# Altium PCB mag_pos_connect.PcbDoc
Units mm, origin at the board's own origin, x right, y up, seen from the top; angles counter-clockwise.
Board outline 14 x 13.92 mm, 2 copper layers (Top Layer, Bottom Layer), stack 1.671 mm thick; 5 components, 4 nets, 8 pads, 1 vias.
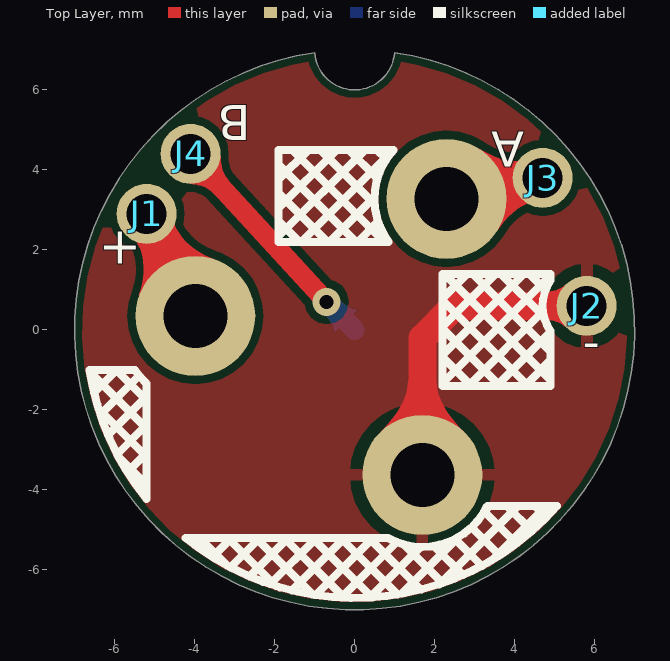
[diagram p0: Top Layer view]
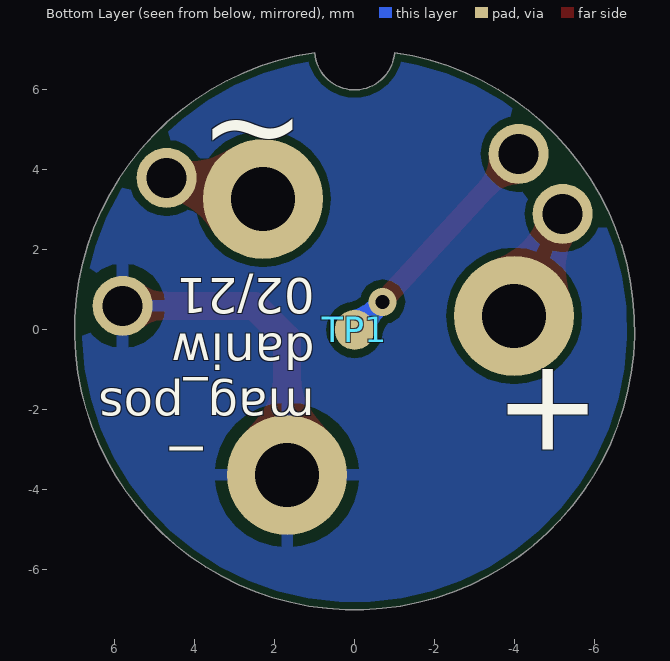
[diagram p1: Bottom Layer view, seen from below]

## Layer stack, top to bottom
Top Solder: solder mask 0.0102, Solder Resist, Dk 3.5
Top Layer: signal copper 0.0356
Dielectric 1: dielectric 1.6, FR-4, Dk 4.8
Bottom Layer: signal copper 0.0356
Bottom Solder: solder mask 0.0102, Solder Resist, Dk 3.5

## Board outline
-0.997,6.929 ccw(c0,0) 0.997,6.929 cw(c0,7)

## Design rules (kind name [scope] priority, off if disabled: settings)
Clearance [All] p1: gap=0.2 ignorepadtopadclearanceinfootprint=FALSE except(0: Arc-Hole Track-Hole SMDPad-Hole THPad-Hole Via-Hole Fill-Hole Poly-Hole Region-Hole Text-Hole)
ComponentClearance [All] p1: gap=0.2 collisioncheckmode=3 verticalgap=0.2 showdistances=FALSE
HoleSize [All] p1: absolutevalues=TRUE maxlimit=3.2 minlimit=0.3 maxpercent=80.000 minpercent=20.000
HoleToHoleClearance [All] p1: gap=0.3 allowstackedmicrovias=TRUE
MinimumAnnularRing [All] p1: minimumring=0.15
MinimumSolderMaskSliver [All] p1: minsoldermaskwidth=0.1
PolygonConnect [All] p1: thpad.connectstyle=Relief thpad.reliefconductorwidth=0.3 thpad.reliefentries=4 thpad.polygonreliefangle="90 Angle" thpad.airgapwidth=0.3 smdpad.connectstyle=Relief smdpad.reliefconductorwidth=0.25 smdpad.reliefentries=4 smdpad.polygonreliefangle="90 Angle" smdpad.airgapwidth=0.25 via.connectstyle=Direct via.reliefconductorwidth=0.254 via.reliefentries=4 via.polygonreliefangle="90 Angle" via.airgapwidth=0.254
RoutingVias [All] p1: holewidth=0.35 width=0.7 viastyle="Through Hole" minholewidth=0.3 minwidth=0.65 maxholewidth=0.5 maxwidth=3
SilkToSilkClearance [All] p1: silktosilkclearance=0.1
SilkToSolderMaskClearance [IsPad] p1: minsilkscreentomaskgap=0.15 clearancetoexposedcopper=TRUE
SolderMaskExpansion SolderMaskExpansion_Via [IsVia] p1: expansion=0.102 istentingtop=TRUE
SolderMaskExpansion [All] p2: expansion=0.05 istentingtop=FALSE
Width [All] p1: maxlimit=1 minlimit=0.2 preferedwidth=0.2 minimp=50.000000 maximp=50.000000 favimp=50.000000
24 further rules are at their usual default settings.

## Components (designator, comment, footprint, x,y, rotation, side; value= is the part's Value field where it differs from the comment)
J1 "+5V" WIRE_1MM_1.5MM_THT -5.2,2.9 r0 top
J2 "GND" WIRE_1MM_1.5MM_THT 5.8,0.6 r0 top
J3 "A" WIRE_1MM_1.5MM_THT 4.7,3.8 r0 top
J4 "B" WIRE_1MM_1.5MM_THT -4.1,4.4 r0 top
TP1 "B" TP_SMD_1MM 0,0 r180 bottom

## Footprints (in the part's own frame and the unit in brackets; to place one, negate y for a bottom-side part, rotate by r counter-clockwise, add the part's x,y. Pads: shape width x height; smd on the part's side, far side on the other; paste and mask are expansions set on the pad)
TP_SMD_1MM [mm] "Testpoint SMD 1mm"
  round 1 smd: 1(0,0)
  body extent -0.5,-0.5 0.5,0.5, height 0.1
WIRE_1MM_1.5MM_THT [mm] "Wire with 1mm diameter, 1.5mm pad diameter"
  round 1.5 hole 1: 1(0,0)
  body extent -0.35,-0.35 0.35,0.35, height 3

## Part data
J1 J2 J3 J4: library part Wire_1MM, "1mm Wire", System=Connector
TP1: library part TP_SMD_1mm, "Testpoint SMD 1mm"

## Free pads (board coordinates)
  round 3 hole 1.6: 1(-3.985,0.349) 1(1.69,-3.625) 1(2.294,3.277)

## Via types
v1: diameter 0.7, hole 0.35, Top Layer to Bottom Layer, tented both sides, 1 vias

## Nets (pads, with @x,y where several pads share a name; then routed paths per layer and width w, separated by ;. In a path a pad name is that pad's centre, name@x,y a point inside that pad or via, vN(x,y) a via of type N, cw(c..) or ccw(c..) an arc to the next point about the centre after c; other vN are vias at no path point)
+5V: J1.1 pad.1@-3.985,0.349 | length 2.8
  Top Layer w1: J1.1 pad.1@-3.985,0.349
A: J3.1 pad.1@2.294,3.277 | length 2.5
  Top Layer w1: pad.1@2.294,3.277 J3.1
B: J4.1 TP1.1 | length 6
  Top Layer w0.5: J4.1 v1(-0.7,0.7)
  Bottom Layer w0.5: v1(-0.7,0.7) TP1.1
GND: J2.1 pad.1@1.69,-3.625 | length 7.9
  Top Layer w0.7: pad.1@1.69,-3.625 1.69,-0.21 2.5,0.6 J2.1

## Polygon pours and split planes (outlines as drawn)
no net on Top Overlay "NONET_L03_P-001" (hatched 45Degree grid 0.5 track 0.2, remove dead copper): 2.2,-1.4 2.2,1.4 4.9,1.4 4.9,1.232 ccw(c5.8,0.6) 4.9,-0.032 4.9,-1.4
no net on Top Overlay "NONET_L03_P-001" (hatched 45Degree grid 0.5 track 0.2, remove dead copper): -1.9,2.2 0.852,2.2 cw(c2.294,3.277) 0.974,4.5 -1.9,4.5
no net on Top Overlay "NONET_L-01_P-001" (hatched 45Degree grid 0.5 track 0.2, remove dead copper): -5.2,-4.225 cw(c0,0) -6.625,-1 -5.497,-1 ccw(c-4,0) -5.2,-1.342
no net on Top Overlay "NONET_L03_P-001" (hatched 45Degree grid 0.5 track 0.2, remove dead copper): -4.225,-5.2 ccw(c0,0) 5.053,-4.4 3.315,-4.4 cw(c1.69,-3.625) 0.819,-5.2
GND on Bottom Layer "GND_L04_P002" (solid, remove dead copper, pour order 2): -1.162,6.7 ccw(c0,0) 1.162,6.7 cw(c0,7)
GND on Top Layer "GND_L01_P003" (solid, remove dead copper, pour order 3): -1.162,6.7 ccw(c0,0) 1.162,6.7 cw(c0,7)

## Silkscreen, mask and mechanical layers (free items; w line width, h text height)
Top Overlay:
  text "B" at -2.6,5.9 h1.5 r180
  text "A" at 4.245,5.237 h1.5 r180
  text "+" at -6.4,1.334 h1.6
  text "-" at 5.7,-0.988 h1.5
Bottom Overlay:
  text "~" at 1.206,6.763 h4 r180
  text "02/21" at 1,1.583 h1.5 r180
  text "daniw" at 1,0.185 h1.5 r180
  text "mag_pos" at 1.001,-1.182 h1.5 r180
  text "+" at -3.486,-3.761 h4
  text "-" at 4.787,-4.528 h4
Drill Guide:
  lines w0.1: -6.726,1 ccw(c0,0) 6.151,2.9 ccw(c0,0) 1.162,6.7 cw(c0,7) -1.162,6.7 ccw(c0,0) -6.726,1
Board:
  the board outline again, w0.1
Drill Drawing:
  lines w0.1: -6.625,-1 ccw(c0,0) -5.2,-4.225 ; -4.225,-5.2 ccw(c0,0) 5.053,-4.4
  lines w0.2: -6.625,-1 -5.497,-1 ccw(c-4,0) -5.2,-1.342 -5.2,-4.225 ; -4.225,-5.2 0.819,-5.2 ccw(c1.69,-3.625) 3.315,-4.4 5.053,-4.4 ; 1.3,2.2 2,2.2 2,4.5 1.4,4.5 ; 1.7,-5.2 1.7,-4.4 2.9,-4.4 ; -1.9,2.2 0.852,2.2 cw(c2.294,3.277) 0.974,4.5 -1.9,4.5 -1.9,2.2 ; 2.2,-1.4 2.2,1.4 4.9,1.4 4.9,1.232 ccw(c5.8,0.6) 4.9,-0.032 4.9,-1.4 2.2,-1.4